# Altium PCB Relay_Unit.PcbDoc
Units mm, origin at the board's own origin, x right, y up, seen from the top; angles counter-clockwise.
Board outline 250 x 162.5 mm, 2 copper layers (Top Layer, Bottom Layer); 40 components, 56 nets, 150 pads, 0 vias.
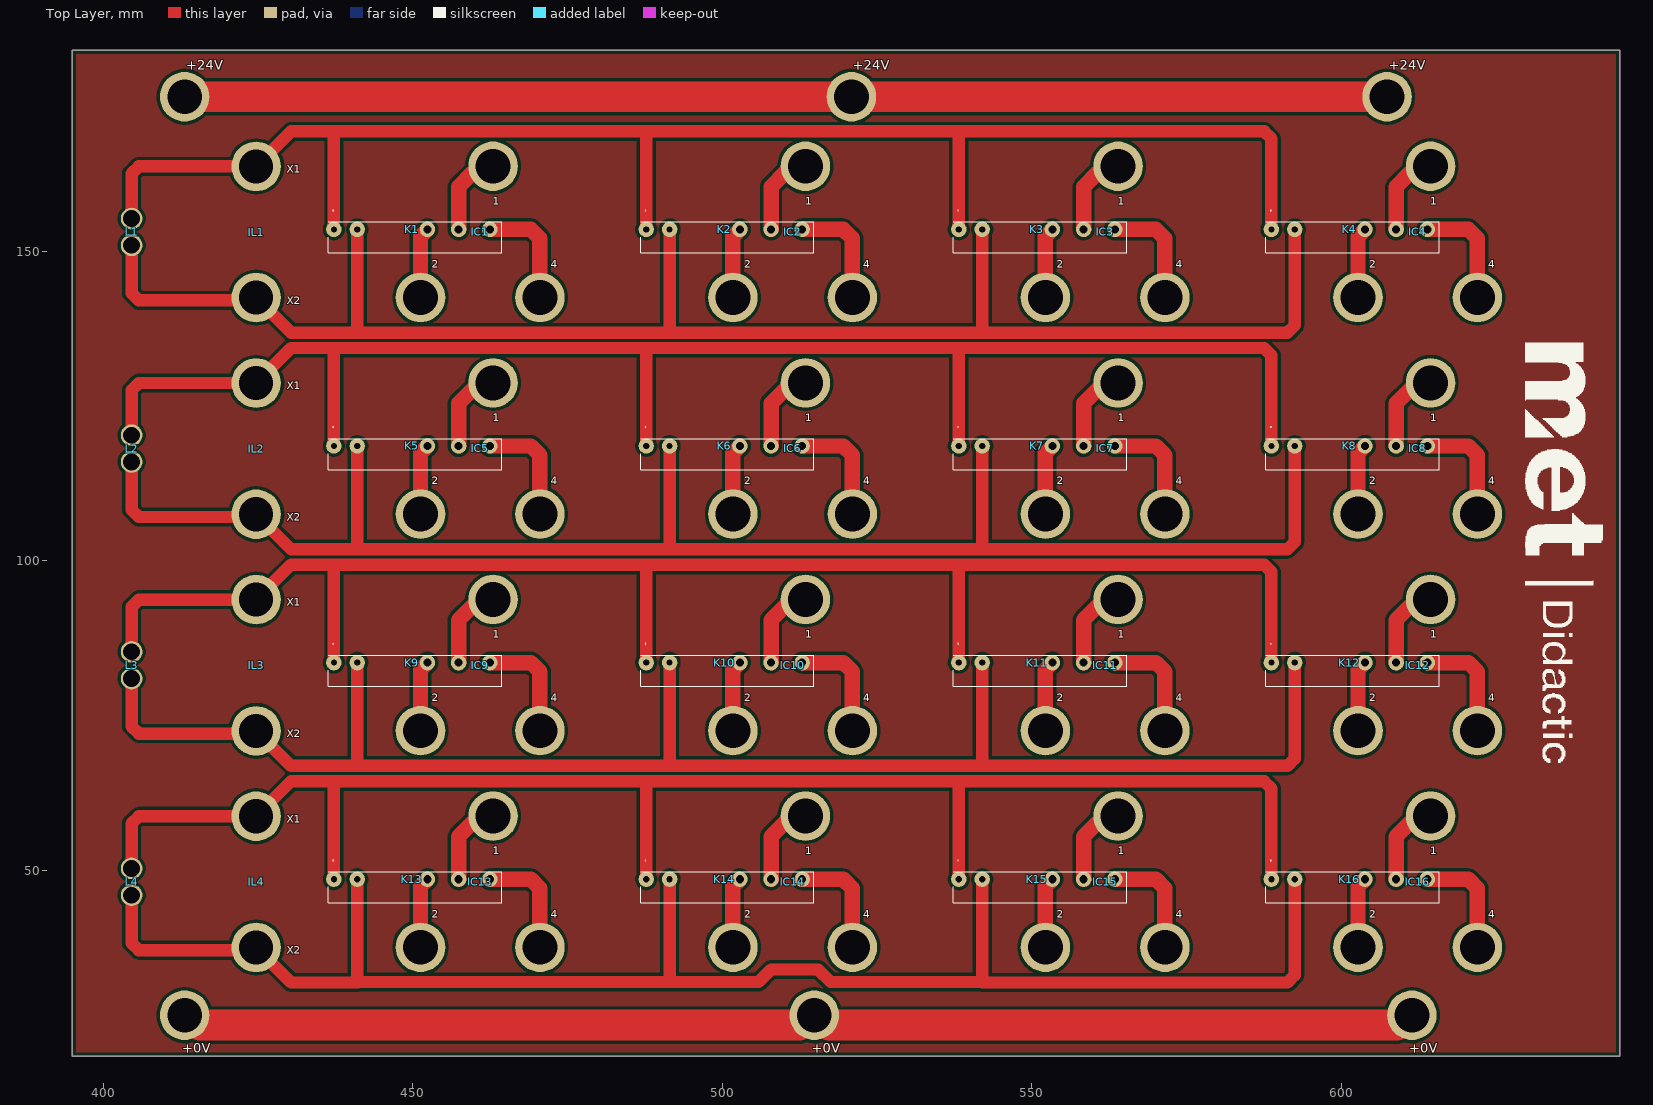
[diagram p0: Top Layer view]
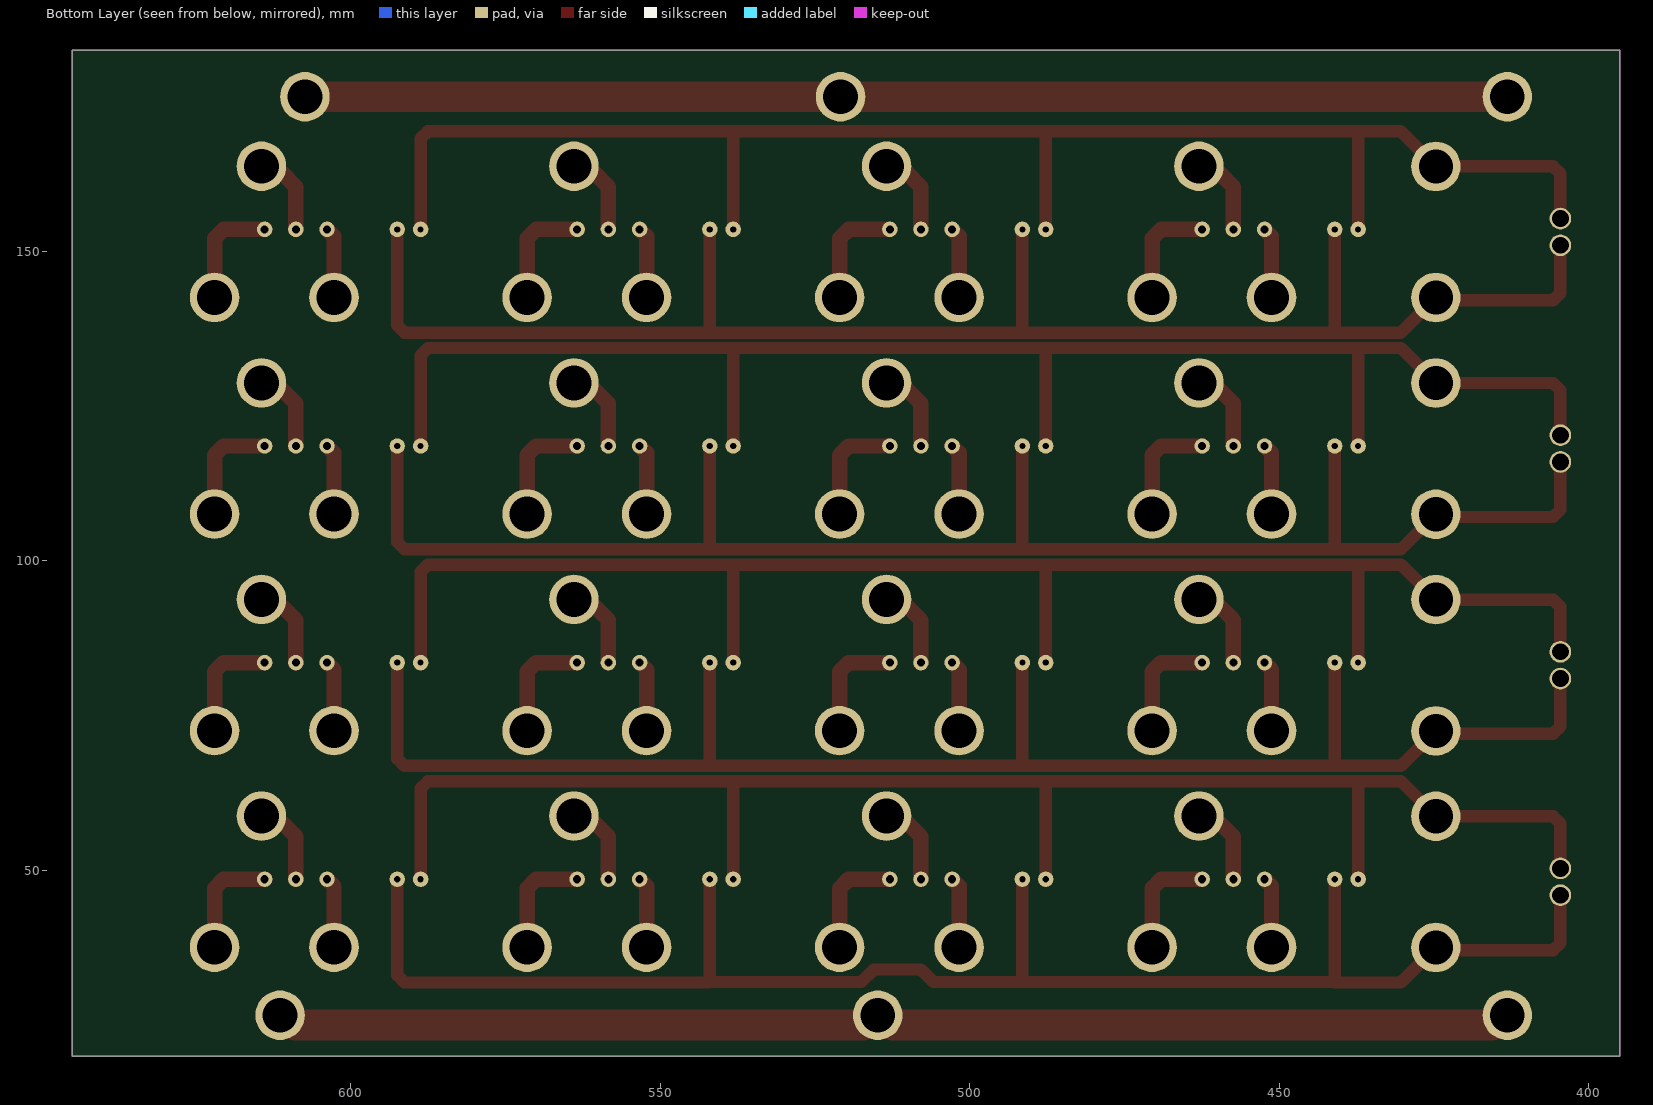
[diagram p1: Bottom Layer view, seen from below]

## Layer stack, top to bottom
Top Solder: solder mask 0.0102, Solder Resist, Dk 3.5
Top Layer: signal copper 0.0356
Dielectric 1: dielectric 0.32, FR-4, Dk 4.8
Bottom Layer: signal copper 0.0356
Bottom Solder: solder mask 0.0102, Solder Resist, Dk 3.5

## Board outline
395,20 645,20 645,182.5 395,182.5

## Design rules (kind name [scope] priority, off if disabled: settings)
Clearance [All] p1: gap=0.5 ignorepadtopadclearanceinfootprint=FALSE
PolygonConnect [All] p1: connectstyle=Relief reliefconductorwidth=0.254 reliefentries=4 polygonreliefangle="90 Angle" airgapwidth=0.254
RoutingLayers [All] p1: top layer_v5=TRUE bottom layer_v5=FALSE
RoutingVias [All] p1: holewidth=0.711 width=1.27 viastyle="Through Hole" minholewidth=0.711 minwidth=1.27 maxholewidth=0.711 maxwidth=1.27
SolderMaskExpansion [All] p1: expansion=0.102 istentingtop=FALSE
Width [All] p1: maxlimit=5 minlimit=1 preferedwidth=2.5 minimp=50.000000 maximp=50.000000 favimp=50.000000
29 further rules are at their usual default settings.

## Components (designator, comment, footprint, x,y, rotation, side; value= is the part's Value field where it differs from the comment)
IC1 "3 Pin Pano Contact" Contact 446.725,138.075 r0 top
IC2 "3 Pin Pano Contact" Contact 497.2,138.075 r0 top
IC3 "3 Pin Pano Contact" Contact 547.7,138.075 r0 top
IC4 "3 Pin Pano Contact" Contact 598.2,138.075 r0 top
IC5 "3 Pin Pano Contact" Contact 446.725,103.075 r0 top
IC6 "3 Pin Pano Contact" Contact 497.2,103.075 r0 top
IC7 "3 Pin Pano Contact" Contact 547.7,103.075 r0 top
IC8 "3 Pin Pano Contact" Contact 598.2,103.075 r0 top
IC9 "3 Pin Pano Contact" Contact 446.725,68.075 r0 top
IC10 "3 Pin Pano Contact" Contact 497.2,68.075 r0 top
IC11 "3 Pin Pano Contact" Contact 547.7,68.075 r0 top
IC12 "3 Pin Pano Contact" Contact 598.2,68.075 r0 top
IC13 "3 Pin Pano Contact" Contact 446.725,33.075 r0 top
IC14 "3 Pin Pano Contact" Contact 497.2,33.075 r0 top
IC15 "3 Pin Pano Contact" Contact 547.7,33.075 r0 top
IC16 "3 Pin Pano Contact" Contact 598.2,33.075 r0 top
IL1 "2 Pin Led Contact" LED_Contact 419.875,137.9 r0 top
IL2 "2 Pin Led Contact" LED_Contact 419.875,102.9 r0 top
IL3 "2 Pin Led Contact" LED_Contact 419.875,67.9 r0 top
IL4 "2 Pin Led Contact" LED_Contact 419.875,32.9 r0 top
K1 "APF30224" APF30224 437.252,153.575 r0 top
K2 "APF30224" APF30224 487.727,153.575 r0 top
K3 "APF30224" APF30224 538.227,153.575 r0 top
K4 "APF30224" APF30224 588.727,153.575 r0 top
K5 "APF30224" APF30224 437.252,118.575 r0 top
K6 "APF30224" APF30224 487.727,118.575 r0 top
K7 "APF30224" APF30224 538.227,118.575 r0 top
K8 "APF30224" APF30224 588.727,118.575 r0 top
K9 "APF30224" APF30224 437.252,83.575 r0 top
K10 "APF30224" APF30224 487.727,83.575 r0 top
K11 "APF30224" APF30224 538.227,83.575 r0 top
K12 "APF30224" APF30224 588.727,83.575 r0 top
K13 "APF30224" APF30224 437.252,48.575 r0 top
K14 "APF30224" APF30224 487.727,48.575 r0 top
K15 "APF30224" APF30224 538.227,48.575 r0 top
K16 "APF30224" APF30224 588.727,48.575 r0 top
L1 "Blue LED" MSL_AC-DC_24V_BLUE_LED 404.573,153.15 r0 top
L2 "Blue LED" MSL_AC-DC_24V_BLUE_LED 404.573,118.15 r0 top
L3 "Blue LED" MSL_AC-DC_24V_BLUE_LED 404.573,83.15 r0 top
L4 "Blue LED" MSL_AC-DC_24V_BLUE_LED 404.573,48.15 r0 top

## Footprints (in the part's own frame and the unit in brackets; to place one, negate y for a bottom-side part, rotate by r counter-clockwise, add the part's x,y. Pads: shape width x height; smd on the part's side, far side on the other; paste and mask are expansions set on the pad)
APF30224 [mm]
  round 2.5 hole 1: 1(0,0) 2(3.78,0)
  round 2.5 hole 1.3: 3(15.12,0) 4(20.16,0) 5(25.2,0)
  silkscreen extent -0.9,-3.8 27.1,3.1, body extent -0.9,-3.8 27.1,1.2, height 15.1
Contact [mm]
  round 8 hole 5.63: 1(16.25,25.7) 2(4.525,4.5) 3(23.825,4.5)
LED_Contact [mm]
  round 8 hole 5.5: 1(4.825,25.85) 2(4.825,4.65)
MSL_AC-DC_24V_BLUE_LED [mm]
  round 3.5 hole 2.7: +0V(0,-2.15) +24V(0,2.175)

## Part data
IC1 IC2 IC3 IC4 IC5 IC6 IC7 IC8 IC9 IC10 IC11 IC12 IC13 IC14 IC15 IC16: library part Contact
IL1 IL2 IL3 IL4: library part LED_Contact
K1 K2 K3 K4 K5 K6 K7 K8 K9 K10 K11 K12 K13 K14 K15 K16: "Relay or Contactor", Manufacturer_Name=Panasonic, Mouser Part Number=769-APF30224, Arrow Part Number=APF30224, Arrow Price/Stock=https://www.arrow.com/en/products/apf30224/panasonic?region=nac, Datasheet Link=https://static6.arrow.com/aropdfconversion/564973783a483b1a25a054c599f69554fab11ee1/mech_eng_pf.pdf, Height=15mm, Manufacturer_Part_Number=APF30224, Mouser Price/Stock=https://www.mouser.co.uk/ProductDetail/Panasonic-Industrial-Devices/APF30224?qs=A8E0mzn7BECIUk9yoZhBGw%3D%3D
L1 L2 L3 L4: library part MSL_AC-DC_24V_BLUE_LED

## Free pads (board coordinates)
  round 8 hole 5.63: +0V(413.15,26.6) +0V(514.875,26.6) +0V(611.425,26.6) +24V(413.151,175) +24V(520.876,175) +24V(607.425,175)

## Nets (pads, with @x,y where several pads share a name; then routed paths per layer and width w, separated by ;. In a path a pad name is that pad's centre, name@x,y a point inside that pad or via, vN(x,y) a via of type N, cw(c..) or ccw(c..) an arc to the next point about the centre after c; other vN are vias at no path point)
NetK1_3: IC1.2 K1.3 | length 11.5
  Top Layer w2.5: IC1.2 451.25,152.453 K1.3
NetK1_4: IC1.1 K1.4 | length 13.8
  Top Layer w2.5: K1.4 457.412,160.449 459.685,162.723 461.923,162.723 IC1.1
NetK1_5: IC1.3 K1.5 | length 18.2
  Top Layer w2.5: K1.5 469.086,153.575 470.55,152.111 IC1.3
NetK2_3: IC2.2 K2.3 | length 11.5
  Top Layer w2.5: IC2.2 501.725,152.453 K2.3
NetK2_4: IC2.1 K2.4 | length 13.8
  Top Layer w2.5: K2.4 507.887,160.449 510.16,162.723 512.398,162.723 IC2.1
NetK2_5: IC2.3 K2.5 | length 18.2
  Top Layer w2.5: K2.5 519.561,153.575 521.025,152.11 IC2.3
NetK3_3: IC3.2 K3.3 | length 11.5
  Top Layer w2.5: IC3.2 552.225,152.453 K3.3
NetK3_4: IC3.1 K3.4 | length 13.8
  Top Layer w2.5: K3.4 558.387,160.449 560.66,162.723 562.898,162.723 IC3.1
NetK3_5: IC3.3 K3.5 | length 18.2
  Top Layer w2.5: K3.5 570.061,153.575 571.525,152.11 IC3.3
NetK4_3: IC4.2 K4.3 | length 11.5
  Top Layer w2.5: IC4.2 602.725,152.453 K4.3
NetK4_4: IC4.1 K4.4 | length 13.8
  Top Layer w2.5: K4.4 608.887,160.449 611.16,162.723 613.398,162.723 IC4.1
NetK4_5: IC4.3 K4.5 | length 18.2
  Top Layer w2.5: K4.5 620.561,153.575 622.025,152.11 IC4.3
NetK5_3: IC5.2 K5.3 | length 11.5
  Top Layer w2.5: IC5.2 451.25,117.453 K5.3
NetK5_4: IC5.1 K5.4 | length 13.8
  Top Layer w2.5: K5.4 457.412,125.449 459.685,127.723 461.923,127.723 IC5.1
NetK5_5: IC5.3 K5.5 | length 18.2
  Top Layer w2.5: K5.5 469.086,118.575 470.55,117.111 IC5.3
NetK6_3: IC6.2 K6.3 | length 11.5
  Top Layer w2.5: IC6.2 501.725,117.453 K6.3
NetK6_4: IC6.1 K6.4 | length 13.8
  Top Layer w2.5: K6.4 507.887,125.449 510.16,127.723 512.398,127.723 IC6.1
NetK6_5: IC6.3 K6.5 | length 18.2
  Top Layer w2.5: K6.5 519.561,118.575 521.025,117.111 IC6.3
NetK7_3: IC7.2 K7.3 | length 11.5
  Top Layer w2.5: IC7.2 552.225,117.453 K7.3
NetK7_4: IC7.1 K7.4 | length 13.8
  Top Layer w2.5: K7.4 558.387,125.449 560.66,127.723 562.898,127.723 IC7.1
NetK7_5: IC7.3 K7.5 | length 18.2
  Top Layer w2.5: K7.5 570.061,118.575 571.525,117.111 IC7.3
NetK8_3: IC8.2 K8.3 | length 11.5
  Top Layer w2.5: IC8.2 602.725,117.453 K8.3
NetK8_4: IC8.1 K8.4 | length 13.8
  Top Layer w2.5: K8.4 608.887,125.449 611.16,127.723 613.398,127.723 IC8.1
NetK8_5: IC8.3 K8.5 | length 18.2
  Top Layer w2.5: K8.5 620.561,118.575 622.025,117.111 IC8.3
NetK9_3: IC9.2 K9.3 | length 11.5
  Top Layer w2.5: IC9.2 451.25,82.453 K9.3
NetK9_4: IC9.1 K9.4 | length 13.8
  Top Layer w2.5: K9.4 457.412,90.449 459.685,92.723 461.923,92.723 IC9.1
NetK9_5: IC9.3 K9.5 | length 18.2
  Top Layer w2.5: K9.5 469.086,83.575 470.55,82.111 IC9.3
NetK10_3: IC10.2 K10.3 | length 11.5
  Top Layer w2.5: IC10.2 501.725,82.453 K10.3
NetK10_4: IC10.1 K10.4 | length 13.8
  Top Layer w2.5: K10.4 507.887,90.449 510.16,92.723 512.398,92.723 IC10.1
NetK10_5: IC10.3 K10.5 | length 18.2
  Top Layer w2.5: K10.5 519.561,83.575 521.025,82.111 IC10.3
NetK11_3: IC11.2 K11.3 | length 11.5
  Top Layer w2.5: IC11.2 552.225,82.453 K11.3
NetK11_4: IC11.1 K11.4 | length 13.8
  Top Layer w2.5: K11.4 558.387,90.449 560.66,92.723 562.898,92.723 IC11.1
NetK11_5: IC11.3 K11.5 | length 18.2
  Top Layer w2.5: K11.5 570.061,83.575 571.525,82.111 IC11.3
NetK12_3: IC12.2 K12.3 | length 11.5
  Top Layer w2.5: IC12.2 602.725,82.453 K12.3
NetK12_4: IC12.1 K12.4 | length 13.8
  Top Layer w2.5: K12.4 608.887,90.449 611.16,92.723 613.398,92.723 IC12.1
NetK12_5: IC12.3 K12.5 | length 18.2
  Top Layer w2.5: K12.5 620.561,83.575 622.025,82.111 IC12.3
NetK13_3: IC13.2 K13.3 | length 11.5
  Top Layer w2.5: IC13.2 451.25,47.453 K13.3
NetK13_4: IC13.1 K13.4 | length 13.8
  Top Layer w2.5: K13.4 457.412,55.449 459.685,57.723 461.923,57.723 IC13.1
NetK13_5: IC13.3 K13.5 | length 18.2
  Top Layer w2.5: K13.5 469.086,48.575 470.55,47.111 IC13.3
NetK14_3: IC14.2 K14.3 | length 11.5
  Top Layer w2.5: IC14.2 501.725,47.453 K14.3
NetK14_4: IC14.1 K14.4 | length 13.8
  Top Layer w2.5: K14.4 507.887,55.449 510.16,57.723 512.398,57.723 IC14.1
NetK14_5: IC14.3 K14.5 | length 18.2
  Top Layer w2.5: K14.5 519.561,48.575 521.025,47.111 IC14.3
NetK15_3: IC15.2 K15.3 | length 11.5
  Top Layer w2.5: IC15.2 552.225,47.453 K15.3
NetK15_4: IC15.1 K15.4 | length 13.8
  Top Layer w2.5: K15.4 558.387,55.449 560.66,57.723 562.898,57.723 IC15.1
NetK15_5: IC15.3 K15.5 | length 18.2
  Top Layer w2.5: K15.5 570.061,48.575 571.525,47.111 IC15.3
NetK16_3: IC16.2 K16.3 | length 11.5
  Top Layer w2.5: IC16.2 602.725,47.453 K16.3
NetK16_4: IC16.1 K16.4 | length 13.8
  Top Layer w2.5: K16.4 608.887,55.449 611.16,57.723 613.398,57.723 IC16.1
NetK16_5: IC16.3 K16.5 | length 18.2
  Top Layer w2.5: K16.5 620.561,48.575 622.025,47.111 IC16.3
X1: IL1.1 K1.1 K2.1 K3.1 K4.1 L1.+24V | length 256.8
  Top Layer w2: L1.+24V 404.573,162.578 405.744,163.75 IL1.1 430.35,169.4 437.2,169.4 ; K1.1 437.252,169.348 437.2,169.4 ; K2.1 487.727,169.348 ; K3.1 538.227,169.348 ; K4.1 588.727,168.228 587.555,169.4 437.2,169.4
X1.1: IL2.1 K5.1 K6.1 K7.1 K8.1 L2.+24V | length 256.8
  Top Layer w2: L2.+24V 404.573,127.578 405.744,128.75 IL2.1 430.35,134.4 437.2,134.4 ; K5.1 437.252,134.348 437.2,134.4 ; K6.1 487.727,134.348 ; K7.1 538.227,134.348 ; K8.1 588.727,133.228 587.555,134.4 437.2,134.4
X1.2: IL3.1 K9.1 K10.1 K11.1 K12.1 L3.+24V | length 256.8
  Top Layer w2: L3.+24V 404.573,92.578 405.744,93.75 IL3.1 430.35,99.4 437.2,99.4 ; K9.1 437.252,99.348 437.2,99.4 ; K10.1 487.727,99.348 ; K11.1 538.227,99.348 ; K12.1 588.727,98.228 587.555,99.4 437.2,99.4
X1.3: IL4.1 K13.1 K14.1 K15.1 K16.1 L4.+24V | length 256.8
  Top Layer w2: L4.+24V 404.573,57.578 405.744,58.75 IL4.1 430.35,64.4 437.2,64.4 ; K13.1 437.252,64.348 437.2,64.4 ; K14.1 487.727,64.348 ; K15.1 538.227,64.348 ; K16.1 588.727,63.228 587.555,64.4 437.2,64.4
X2: IL1.2 K1.2 K2.2 K3.2 K4.2 L1.+0V | length 264.6
  Top Layer w2: L1.+0V 404.573,143.272 405.744,142.1 424.25,142.1 IL1.2 430.35,136.9 441.1,136.9 ; K1.2 441.032,136.968 441.1,136.9 ; 491.507,136.968 K2.2 ; 542.007,136.968 K3.2 ; K4.2 592.507,138.072 591.335,136.9 441.1,136.9
X2.1: IL2.2 K5.2 K6.2 K7.2 K8.2 L2.+0V | length 263.9
  Top Layer w2: L2.+0V 404.573,108.272 405.744,107.1 IL2.2@424.25,107.1 ; IL2.2 430.35,101.9 441.1,101.9 ; K5.2 441.032,101.968 441.1,101.9 ; 491.507,101.968 K6.2 ; 542.007,101.968 K7.2 ; K8.2 592.507,103.072 591.335,101.9 441.1,101.9
X2.2: IL3.2 K9.2 K10.2 K11.2 K12.2 L3.+0V | length 263.9
  Top Layer w2: L3.+0V 404.573,73.272 405.744,72.1 IL3.2@424.25,72.1 ; IL3.2 430.35,66.9 441.1,66.9 ; K9.2 441.032,66.968 441.1,66.9 ; 491.507,66.968 K10.2 ; 542.007,66.968 K11.2 ; K12.2 592.507,68.072 591.335,66.9 441.1,66.9
X2.3: IL4.2 K13.2 K14.2 K15.2 K16.2 L4.+0V | length 265.7
  Top Layer w2: L4.+0V 404.573,38.272 405.744,37.1 IL4.2@424.25,37.1 ; IL4.2 430.35,31.9 441.1,31.9 441.032,31.968 ; K13.2 441.032,31.968 ; K14.2 491.507,31.968 ; K15.2 542.007,31.968 ; K16.2 592.507,33.072 591.335,31.9 542.075,31.9 542.007,31.968 ; 441.032,31.968 491.507,31.968 ; 491.507,31.968 505.868,31.968 507.9,34 515.5,34 517.532,31.968 542.007,31.968
copper on no net: | length 395.2
  Top Layer w5: 413.15,26.6 413.962,26.6 415.562,25 512.463,25 514.063,26.6 514.875,26.6 515.687,26.6 517.287,25 609.013,25 610.613,26.6 611.425,26.6 ; 413.151,175 520.876,175 607.425,175

## Polygon pours and split planes (outlines as drawn)
no net on Top Layer "NONET_L01_P000" (solid, pour order 0): 395,182.5 645,182.5 645,20 395,20

## Keep-outs
Keep-Out Layer:
  the board outline again, w0.254

## Silkscreen, mask and mechanical layers (free items; w line width, h text height)
Top Overlay:
  drawing of 15 lines, arcs and shapes, not listed
  text "+24V" at 413.405,179.404 h1.52
  text "+24V" at 521.13,179.404 h1.52
  text "+24V" at 607.679,179.404 h1.52
  text "X1" at 429.655,162.724 h1.25
  text "1" at 462.929,157.579 h1.25
  text "1" at 513.404,157.579 h1.25
  text "1" at 563.904,157.579 h1.25
  text "1" at 614.404,157.579 h1.25
  text "2" at 453.054,147.354 h1.25
  text "4" at 472.279,147.354 h1.25
  text "2" at 503.529,147.354 h1.25
  text "4" at 522.754,147.354 h1.25
  text "2" at 554.029,147.354 h1.25
  text "4" at 573.254,147.354 h1.25
  text "2" at 604.529,147.354 h1.25
  text "4" at 623.754,147.354 h1.25
  text "X2" at 429.654,141.504 h1.25
  text "X1" at 429.655,127.724 h1.25
  text "1" at 462.929,122.579 h1.25
  text "1" at 513.404,122.579 h1.25
  text "1" at 563.904,122.579 h1.25
  text "1" at 614.404,122.579 h1.25
  text "2" at 453.054,112.354 h1.25
  text "4" at 472.279,112.354 h1.25
  text "2" at 503.529,112.354 h1.25
  text "4" at 522.754,112.354 h1.25
  text "2" at 554.029,112.354 h1.25
  text "4" at 573.254,112.354 h1.25
  text "2" at 604.529,112.354 h1.25
  text "4" at 623.754,112.354 h1.25
  text "X2" at 429.654,106.504 h1.25
  text "X1" at 429.655,92.724 h1.25
  text "1" at 462.929,87.579 h1.25
  text "1" at 513.404,87.579 h1.25
  text "1" at 563.904,87.579 h1.25
  text "1" at 614.404,87.579 h1.25
  text "2" at 453.054,77.354 h1.25
  text "4" at 472.279,77.354 h1.25
  text "2" at 503.529,77.354 h1.25
  text "4" at 522.754,77.354 h1.25
  text "2" at 554.029,77.354 h1.25
  text "4" at 573.254,77.354 h1.25
  text "2" at 604.529,77.354 h1.25
  text "4" at 623.754,77.354 h1.25
  text "X2" at 429.654,71.504 h1.25
  text "X1" at 429.655,57.724 h1.25
  text "1" at 462.929,52.579 h1.25
  text "1" at 513.404,52.579 h1.25
  text "1" at 563.904,52.579 h1.25
  text "1" at 614.404,52.579 h1.25
  text "2" at 453.054,42.354 h1.25
  text "4" at 472.279,42.354 h1.25
  text "2" at 503.529,42.354 h1.25
  text "4" at 522.754,42.354 h1.25
  text "2" at 554.029,42.354 h1.25
  text "4" at 573.254,42.354 h1.25
  text "2" at 604.529,42.354 h1.25
  text "4" at 623.754,42.354 h1.25
  text "X2" at 429.654,36.504 h1.25
  text "+0V" at 412.718,20.579 h1.52
  text "+0V" at 514.443,20.579 h1.52
  text "+0V" at 610.993,20.579 h1.52
Drill Guide:
  drawing of 167 lines, arcs and shapes, not listed